# Allegro board QUADCOPTER1brd2.brd
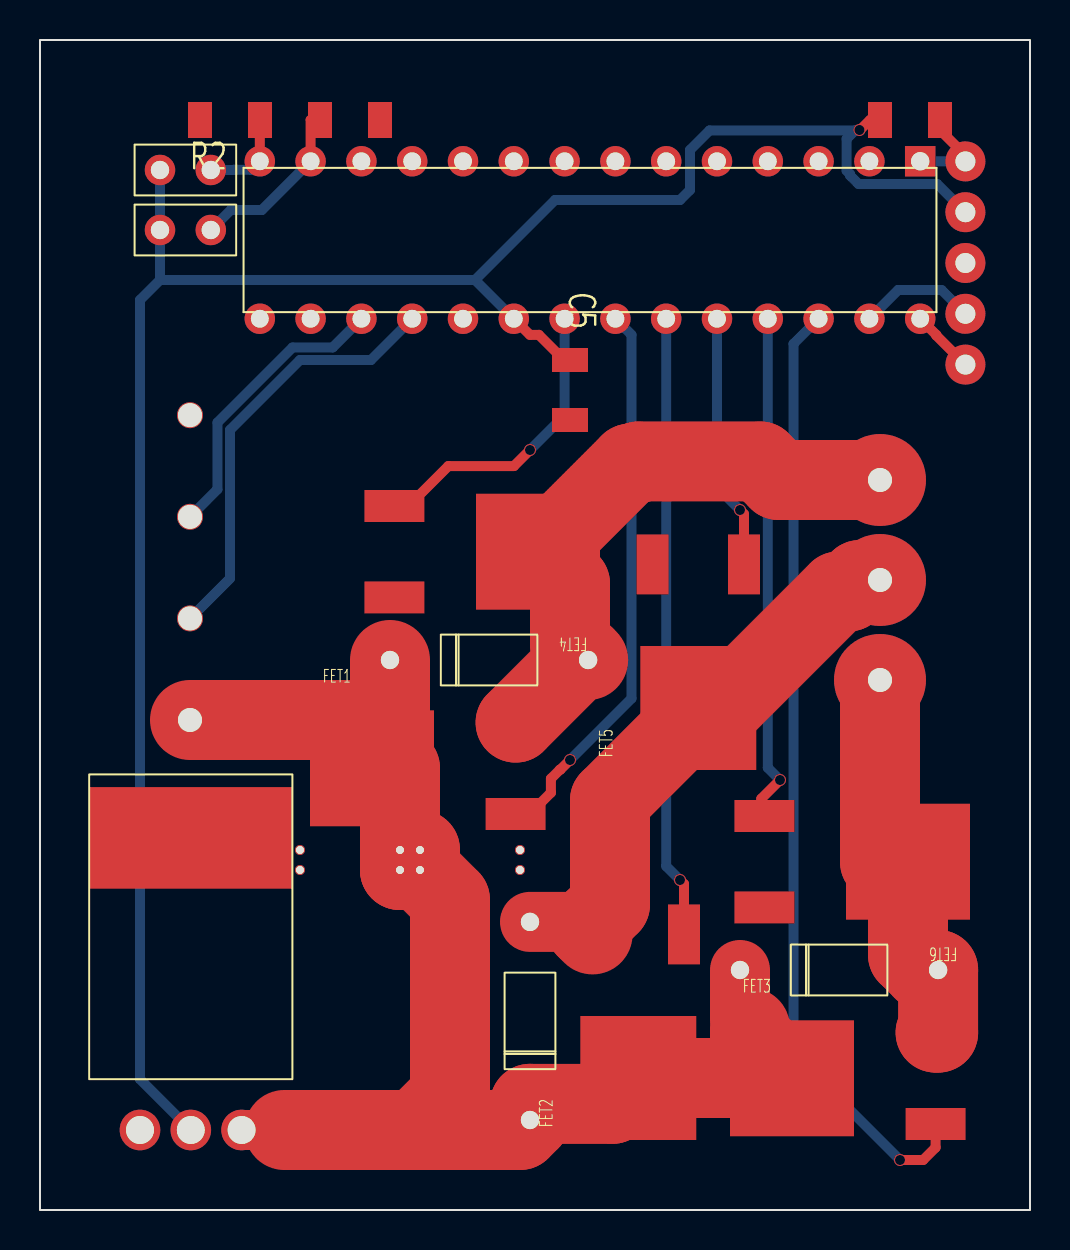
[diagram p0: board, top side]
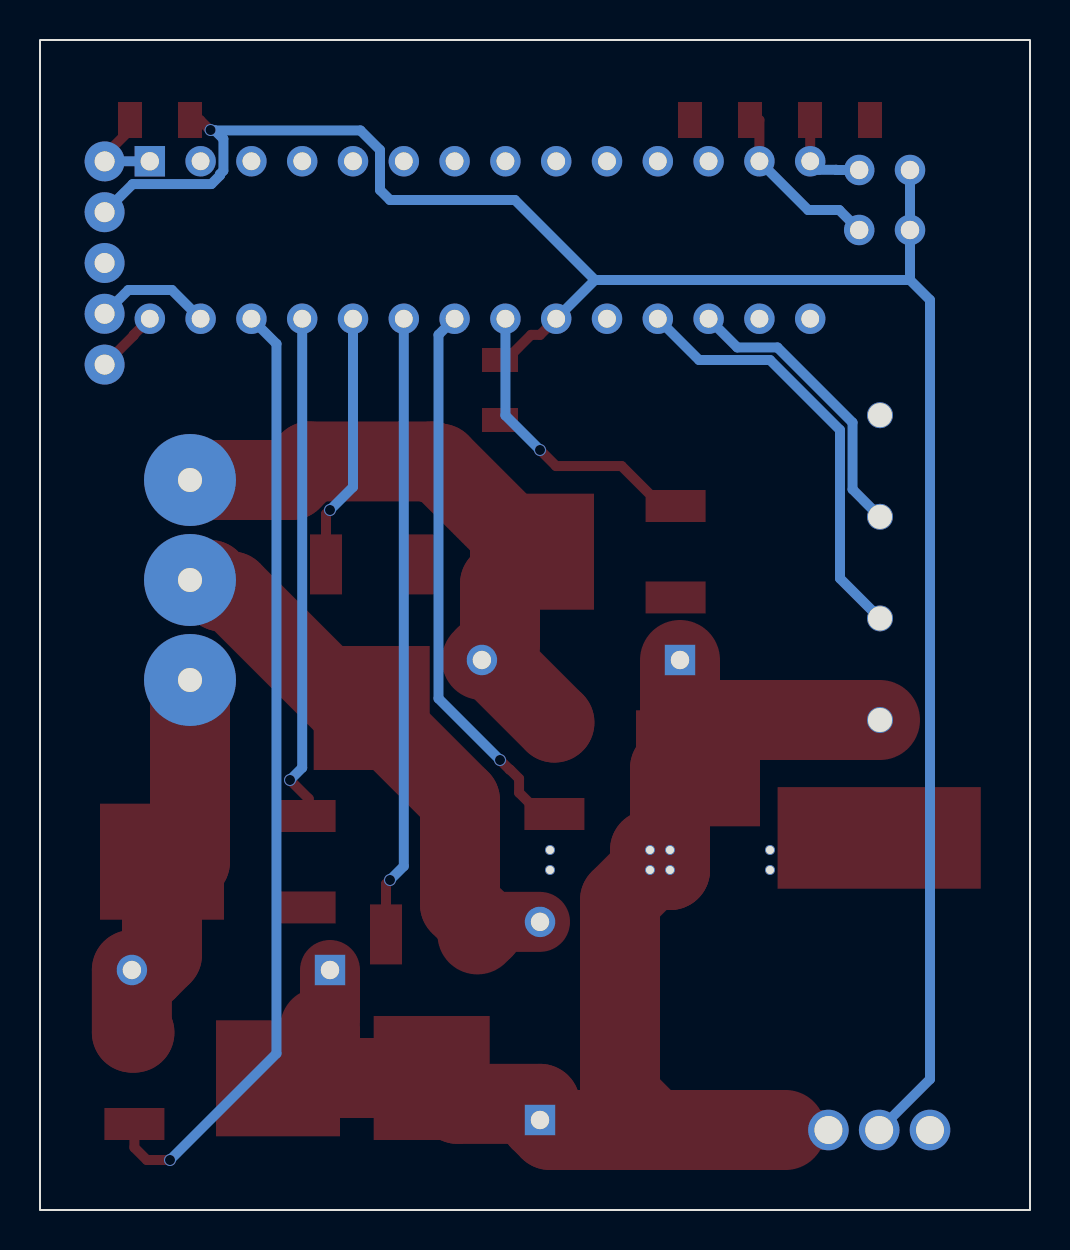
[diagram p1: board, bottom side, seen from below]

Outline 49.5 x 58.5 mm; copper layers: TOP, BOTTOM. Coordinates in mm from the lower left corner of the outline.
Outline path: rectangle 0,0 49.5,58.5

## Placement (name value [footprint] x y rotation side)
C5  4.7uF  [SMD_CAP_1206]  26.5 41 270 top
C6  100uF  [CAP250]  21 20 180 top
C7  100uF  [CAP250]  21 21 180 top
C8  100uF  [CAP250]  16 14 0 top
C9  100uF  [CAP250]  16 15 0 top
D1  ga6  [DO41]  17.5 27.5 270 top
D2  ga6  [DO41]  24.5 4.5 0 top
D3  ga6  [DO41]  35 12 270 top
FET1  ON NTD5867  [NTD5867]  13.5 19 0 top
FET2  ON NTD5867  [NTD5867]  33 3.5 90 top
FET3  ON NTD5867  [NTD5867]  34.5 3.5 0 top
FET4  ON NTD5867  [NTD5867]  28 36 180 top
FET5  ON NTD5867  [NTD5867]  36 22 90 top
FET6  ON NTD5867  [NTD5867]  46.5 20.5 180 top
J1  JUMPER  [JUMPER2]  6 49 0 top
J2  JUMPER  [JUMPER2]  6 52 0 top
J3  CON5  [CONN5]  45 41 0 top
J4  To Motor  [ED1362]  39.5 39 270 top
J5  To Microcontroller  [KDCONN4]  17.5 14.5 90 top
Q2  Diodes_AP1117T50L-U  [TO220-3]  5 4 270 top
R1  10k  [SMD_RES_1206]  43.5 54.5 180 top
R2  10k  [SMD_RES_1206]  9.5 54.5 0 top
R3  10k  [SMD_RES_1206]  15.5 54.5 180 top
U2  -  [PIC16F916]  27.5 48.5 270 top

## Library data of the parts
C5-C9 = CAP
D1-D3 = ga6
FET1-FET6 = ON NTD5867
J1 J2 = JUMPER: User Part Number: ***
J3 = CON5
J4 = CON3
J5 = 4 HEADER
Q2 = Diodes_AP1117T50L-U_1
R1-R3 = R
U2 = PIC16F916_2

## Footprints (pads in the part's own frame, mm; a bottom-side part is the same pattern mirrored in y, then rotated)
CAP250
  round 0.5 hole 0.4: 1(3,3) 2(8,3)
CONN5
  round 2 hole 1: 1(1.27,11.43) 2(1.27,8.89) 3(1.27,6.35) 4(1.27,3.81) 5(1.27,1.27)
DO41
  rect 1.524x1.524 hole 0.914: 1(0,0)
  round 1.524 hole 0.914: 2(0,9.906)
ED1362
  round 4.6 hole 1.2: 1(2.5,2.5) 2(7.5,2.5) 3(12.5,2.5)
JUMPER2
  round 1.524 hole 0.914: 1(0,0) 2(2.54,0)
KDCONN4
  round 1.3 hole 1.2: 1(10,10) 2(15.08,10) 3(20.16,10) 4(25.24,10)
NTD5867
  rect 3x1.6 smd: 1(10.28,0.8) 3(10.28,5.372)
  rect 6.2x5.8 smd: 2(3.1,3.086)
PIC16F916
  rect 1.524x1.524 hole 0.914: 1(-3.937,16.51)
  round 1.524 hole 0.889: 2(-3.937,13.97) 3(-3.937,11.43) 4(-3.937,8.89) 5(-3.937,6.35) 6(-3.937,3.81) 7(-3.937,1.27) 8(-3.937,-1.27) 9(-3.937,-3.81) 10(-3.937,-6.35) 11(-3.937,-8.89) 12(-3.937,-11.43) 13(-3.937,-13.97) 14(-3.937,-16.51) 15(3.937,-16.51) 16(3.937,-13.97) 17(3.937,-11.43) 18(3.937,-8.89) 19(3.937,-6.35) 20(3.937,-3.81) 21(3.937,-1.27) 22(3.937,1.27) 23(3.937,3.81) 24(3.937,6.35) 25(3.937,8.89) 26(3.937,11.43) 27(3.937,13.97) 28(3.937,16.51)
SMD_CAP_1206
  rect 1.2x1.8 smd: 1(-1.5,0) 2(1.5,0)
SMD_RES_1206
  rect 1.2x1.8 smd: 1(-1.5,0) 2(1.5,0)
TO220-3
  rect 5.08x10.16 smd: (-14.605,2.54)
  round 2.032 hole 1.397: 1(0,0) 2(0,2.54) 3(0,5.08)

## Nets
12V: C6.1 C7.1 C8.1 C9.1 D1.1(K) D2.1(K) D3.1(K) FET1.2(D) FET2.2(D) FET3.2(D) J5.1 Q2.3(VIN)
GND: C5.2 C6.2 C7.2 C8.2 C9.2 FET4.3(S) FET5.3(S) FET6.3(S) J3.3 J5.4 Q2.1(GND) R2.1 R3.1 U2.8(VSS#8) U2.19(VSS#19)
A: D1.2(A) FET1.3(S) FET4.2(D) J4.1 U2.3(RA1)
ADDR0: J1.2 R3.2 U2.13(RC2)
ADDR1: J2.2 R2.2 U2.14(RC3)
AHIGH: FET1.1(G) U2.22(RB1)
ALOW: FET4.1(G) U2.21(RB0)
B: D2.2(A) FET2.3(S) FET5.2(D) J4.2 U2.4(RA2)
BHIGH: FET2.1(G) U2.23(RB2)
BLOW: FET5.1(G) U2.24(RB3)
C: D3.2(A) FET3.3(S) FET6.2(D) J4.3 U2.5(RA3)
CHIGH: FET3.1(G) U2.26(RB5)
CLOW: FET6.1(G) U2.25(RB4)
ICPSCLK: J3.4 U2.27(ICSPCLK)
ICSPDAT: J3.5 U2.28(ICSPDAT)
NMCLR: J3.1 R1.1 U2.1($0)
SCL: J5.3 U2.17(SCL)
SDA: J5.2 U2.18(SDA)
VEXT: C5.1 J1.1 J2.1 J3.2 Q2.2(VOUT) R1.2 U2.20(VDD)

Pads without a net: U2 2 6 7 9 10 11 12 15 16

## Via types
v1: diameter 0.6, hole 0.5, TOP to BOTTOM, 7 vias

## Routing (per net, layer and track width the routed paths; a pad name or vN(x,y) marks a point on that pad's centre or on a via; arc(x,y) is an arc through that point)
12V: length 75.3
  TOP w2: 12.22,4 Q2.3
  TOP w3: 35.5,9.11 35,9.61 D3.1
  TOP w4: 37.6,6.6 35.5,8.7 35.5,9.11 ; 37.6,6.6 FET3.2 ; 37.6,6.6 FET2.2 28.62,5.31 24.5,5.31 D2.1 24,4 18.79,4 ; C7.1 C6.1 C8.1 20.5,15.5 20.5,5.71 18.79,4 ; C7.1 18,22.09 17.5,22.09 ; C7.1 C9.1 ; 17.5,22.09 FET1.2 16.6,24.5 J5.1 ; 17.5,22.09 D1.1 ; 18.79,4 12.22,4
A: length 30.6
  TOP w4: J4.1 36.93,36.5 36.01,37.43 29.93,37.43 29.82,37.32 29.5,37.32 25.1,32.91 FET4.2 26.5,31.31 26.5,28.27 27.09,27.68 ; D1.2 27.22,27.68 27.09,27.68 ; 27.09,27.68 FET1.3
ADDR0: length 8.9
  TOP w0.5: U2.13 13.53,54.5 R3.2
  BOTTOM w0.5: J1.2 9.54,50 11.09,50 U2.13
ADDR1: length 4.7
  TOP w0.5: R2.2 10.99,54.5 U2.14
  BOTTOM w0.5: J2.2 9.68,52 9.69,52.01 10.56,52.01 U2.14
AHIGH: length 27.9
  TOP w0.5: v1(26.5,22.5) 26.02,22.02 26,22.02 25.55,21.57 25.55,20.87 24.48,19.8 FET1.1
  BOTTOM w0.5: U2.22 29.58,43.76 29.58,25.58 v1(26.5,22.5)
ALOW: length 15.2
  TOP w0.5: v1(24.5,38) 23.7,37.2 20.42,37.2 18.42,35.2 FET4.1
  BOTTOM w0.5: U2.21 26.23,39.73 v1(24.5,38)
B: length 28.6
  TOP w3: 27.63,14.41 D2.2
  TOP w4: J4.2 41,31.5 40.43,30.93 39.93,30.93 34.1,25.1 FET5.2 32.91,24.9 28.5,20.49 28.5,15.28 27.32,14.09 FET2.3
BHIGH: length 31.2
  TOP w0.5: v1(32,16.5) 32.2,16.3 FET2.1
  BOTTOM w0.5: v1(32,16.5) 31.31,17.19 U2.23
BLOW: length 12.8
  TOP w0.5: v1(35,35) 35.2,34.8 FET5.1
  BOTTOM w0.5: v1(35,35) 33.85,36.15 U2.24
C: length 20.2
  TOP w4: FET3.3 44.91,8.87 D3.2 44.16,12 43.4,12.76 FET6.2 42,17.41 J4.3
CHIGH: length 48
  TOP w0.5: v1(43,2.5) 44.16,2.5 44.78,3.12 FET3.1
  BOTTOM w0.5: U2.26 37.68,43.31 37.68,7.82 v1(43,2.5)
CLOW: length 25.6
  TOP w0.5: FET6.1 36.06,19.86 36.06,20.56 v1(37,21.5)
  BOTTOM w0.5: U2.25 36.39,22.11 v1(37,21.5)
ICPSCLK: length 5.9
  BOTTOM w0.5: U2.27 42.91,46 45.08,46 J3.4
ICSPDAT: length 3.2
  TOP w0.5: U2.28 44.82,43.76 44.82,43.72 J3.5
NMCLR: length 4.9
  TOP w0.5: J3.1 46.27,52.73 45,54 R1.1
  BOTTOM w0.5: J3.1 46.26,52.44 U2.1
SCL: length 14.6
  BOTTOM w0.5: U2.17 14.63,43.13 12.63,43.13 8.87,39.37 8.87,36.03 J5.3
SDA: length 21.7
  BOTTOM w0.5: J5.2 9.5,31.58 9.5,39 13,42.5 16.55,42.5 U2.18
VEXT: length 105.4
  TOP w0.5: v1(40.97,54) 41,54 41.5,54.5 R1.2 ; C5.1 26.2,42.5 24.94,43.76 24.5,43.76 U2.20
  BOTTOM w0.5: 40.76,53.98 33.48,53.98 32.5,53 32.5,51 32,50.5 25.75,50.5 21.75,46.5 ; 40.76,53.98 40.33,53.55 40.33,51.97 40.5,51.8 40.5,51.73 40.93,51.3 44.86,51.3 J3.2 ; 40.76,53.98 40.95,53.98 v1(40.97,54) ; 21.75,46.5 U2.20 ; 21.75,46.5 6,46.5 ; Q2.2 5,6.54 5,45.5 6,46.5 ; 6,46.5 J1.1 J2.1
